# EAGLE board sidepcb (EAGLE 6.5.0)
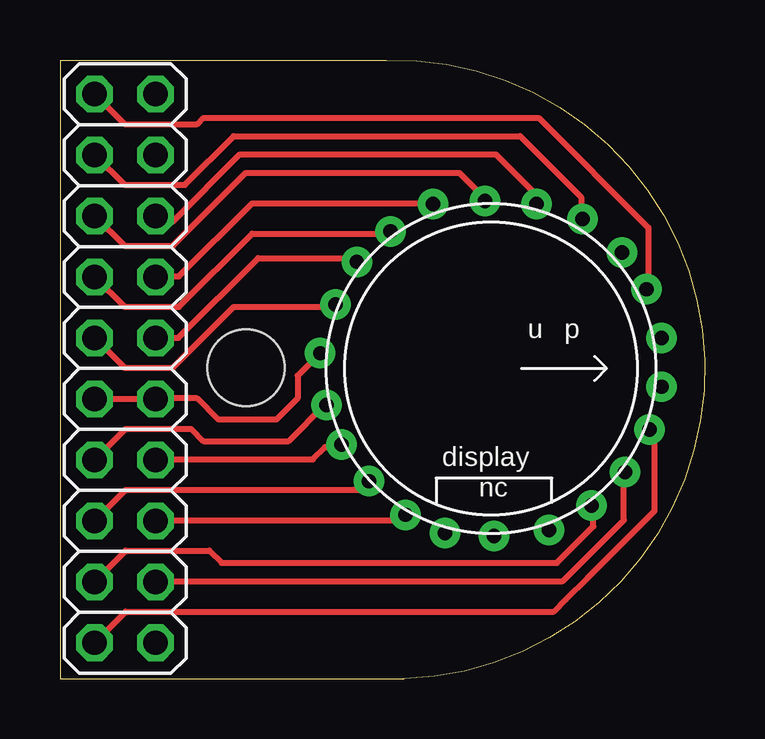
[diagram p0: board, top side]
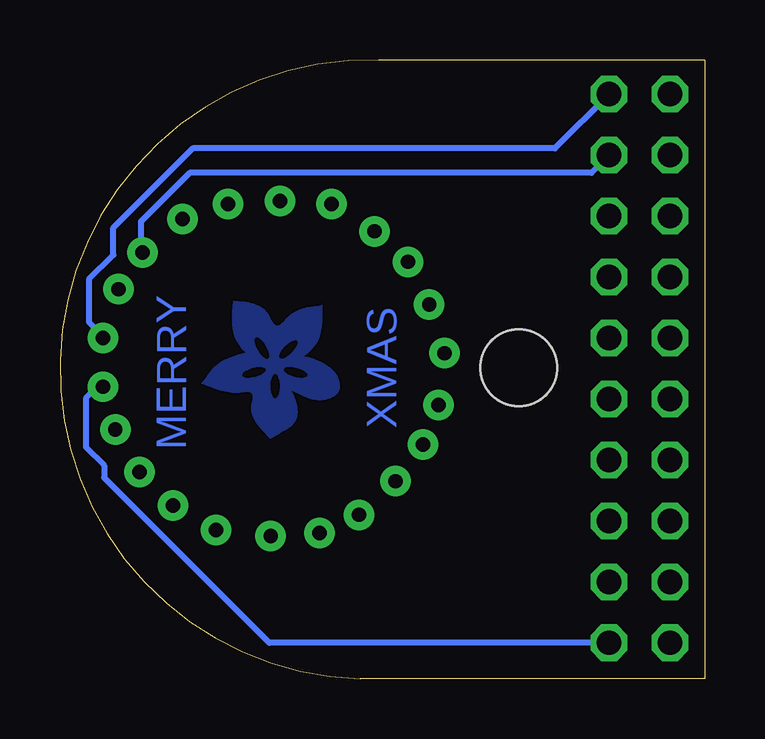
[diagram p1: board, bottom side, seen from below]

Size 26.86 x 25.78 mm. Coordinates in mm from the lower left corner, seen from the top.
Outline: 0,25.78 0,0 14.35,0 arc180 13.59,25.78 0,25.78
Copper layers (1*16): Top 0.0356mm / dielectric 1.5011mm / Bottom 0.0356mm
Design rules "LaenPCBOrder": minimum track width 6mil, minimum drill 13mil, track to track 6mil, track to pad 6mil, pad to pad 6mil, via to via 6mil, smd to smd 6mil, copper to edge 15mil, drill to drill 6mil, minimum pad ring 7mil, minimum via ring 7mil, stop-mask expansion 4mil, vias tented up to drill 0mil, thermal gap 10mil
Net classes: 0 default: clearance 0.205 mm
Holes 3.2 mm at 7.75,12.95

## Footprints (pad centres in the part's own frame; a part is rotated, then mirrored left to right if it is on the bottom)
IV18 = drill 0.6 pad 1.27: 1 -0.635,-7.112; 2 1.524,-6.858; 3 3.175,-6.223; 4 4.699,-5.08; 5 6.096,-3.556; 6 6.858,-1.905; 7 6.985,0.127; 8 6.731,2.413; 9 5.715,4.191; 10 4.318,5.588; 11 2.54,6.604; 12 0.762,7.112; 13 -1.27,7.112; 14 -3.302,6.477; 15 -4.826,5.461; 16 -6.223,3.81; 17 -6.858,1.905; 18 -6.985,-0.254; 19 -6.858,-2.413; 20 -5.715,-4.191; 21 -4.445,-5.588; 22 -2.667,-6.477
2X10 = drill 1.016 octagon: 1 -11.43,-1.27; 2 -11.43,1.27; 3 -8.89,-1.27; 4 -8.89,1.27; 5 -6.35,-1.27; 6 -6.35,1.27; 7 -3.81,-1.27; 8 -3.81,1.27; 9 -1.27,-1.27; 10 -1.27,1.27; 11 1.27,-1.27; 12 1.27,1.27; 13 3.81,-1.27; 14 3.81,1.27; 15 6.35,-1.27; 16 6.35,1.27; 17 8.89,-1.27; 18 8.89,1.27; 19 11.43,-1.27; 20 11.43,1.27

## Placement (x,y rotation side)
DIS1  IV18  [IV18]  17.95,12.93 270 top
JP2  male  [2X10]  2.71,12.93 270 top

## Library data of the parts
DIS1 = vfd
JP2 = pinhead

## Nets
AC1: DIS1.13 JP2.2
AC2: DIS1.1 JP2.11 JP2.12
VFD'1: DIS1.15 JP2.4
VFD'2: DIS1.22 JP2.9
VFD'3: DIS1.16 JP2.3
VFD'4: DIS1.21 JP2.10
VFD'5: DIS1.17 JP2.6
VFD'6: DIS1.20 JP2.7
VFD'7: DIS1.19 JP2.8
VFD'8: DIS1.18 JP2.5
VFD'9: DIS1.14 JP2.1
VFD'A: DIS1.12 JP2.20
VFD'B: DIS1.10 JP2.18
VFD'C: DIS1.4 JP2.15
VFD'D: DIS1.3 JP2.14
VFD'E: DIS1.5 JP2.16
VFD'F: DIS1.11 JP2.19
VFD'G: DIS1.9 JP2.17
VFD'H: DIS1.2 JP2.13

## Tracks (layer width: path | path; a pad name or v marks a point on that pad's centre or on a via)
AC1
  Bottom 0.254: JP2.2 6.25,22.1 21.34,22.1 24.64,18.8 24.64,17.65 25.65,16.64 25.65,14.86 25.07,14.27 DIS1.13 25.09,14.22
AC2
  Top 0.254: DIS1.1 9.91,12.63 9.91,11.68 9.02,10.79 6.6,10.79 5.72,11.68 4.01,11.68 JP2.12 JP2.11
N$6
  cutout Bottom: 17,14.08 16.97,14.05 16.96,14.01 16.97,13.96 17,13.88 17.05,13.78 17.16,13.64 17.24,13.56 17.34,13.48 17.45,13.4 17.54,13.36 17.62,13.34 17.67,13.35 17.7,13.37 17.71,13.39 17.72,13.42 17.72,13.47 17.71,13.51 17.67,13.58 17.62,13.69 17.52,13.8 17.45,13.87 17.34,13.96 17.27,14.02 17.19,14.06 17.11,14.09 17.06,14.1 17.02,14.1
N$7
  cutout Bottom: 18.17,13.37 18.16,13.4 18.15,13.46 18.16,13.53 18.18,13.63 18.24,13.77 18.29,13.86 18.36,13.98 18.43,14.06 18.49,14.13 18.56,14.18 18.61,14.2 18.65,14.22 18.69,14.21 18.72,14.18 18.74,14.14 18.75,14.11 18.75,14.07 18.74,14.02 18.73,13.98 18.69,13.86 18.66,13.79 18.61,13.68 18.56,13.6 18.51,13.53 18.42,13.43 18.37,13.39 18.31,13.35 18.26,13.33 18.23,13.32 18.2,13.34 18.18,13.35
N$8
  cutout Bottom: 18.29,12.87 18.29,12.9 18.3,12.92 18.33,12.94 18.37,12.96 18.43,12.98 18.49,12.98 18.53,12.98 18.61,12.98 18.68,12.97 18.77,12.95 18.86,12.93 18.96,12.9 19.04,12.86 19.11,12.83 19.18,12.78 19.22,12.74 19.25,12.69 19.26,12.65 19.25,12.61 19.22,12.58 19.17,12.56 19.12,12.55 19.08,12.54 18.95,12.54 18.85,12.56 18.76,12.57 18.69,12.59 18.62,12.62 18.54,12.65 18.46,12.69 18.4,12.73 18.37,12.75 18.33,12.78 18.31,12.81 18.3,12.84 18.29,12.86
N$11
  cutout Bottom: 18.08,12.19 18.07,12.06 18.06,11.94 18.02,11.83 17.99,11.76 17.96,11.71 17.91,11.68 17.88,11.69 17.85,11.7 17.81,11.74 17.78,11.8 17.75,11.86 17.74,11.91 17.73,11.97 17.72,12.04 17.71,12.1 17.71,12.3 17.72,12.38 17.73,12.44 17.74,12.48 17.76,12.53 17.78,12.58 17.8,12.61 17.81,12.64 17.84,12.66 17.86,12.68 17.88,12.69 17.91,12.69 17.94,12.68 17.97,12.64 17.99,12.61 18.02,12.57 18.03,12.52 18.05,12.45 18.07,12.36
N$13
  cutout Bottom: 16.79,12.54 16.72,12.55 16.66,12.56 16.62,12.57 16.59,12.59 16.57,12.61 16.56,12.63 16.56,12.66 16.57,12.69 16.58,12.72 16.61,12.76 16.66,12.8 16.75,12.85 16.85,12.89 16.91,12.92 16.99,12.94 17.05,12.96 17.15,12.97 17.22,12.98 17.27,12.98 17.32,12.98 17.38,12.98 17.43,12.97 17.48,12.95 17.51,12.93 17.52,12.92 17.53,12.89 17.53,12.86 17.51,12.82 17.48,12.78 17.44,12.75 17.4,12.72 17.35,12.69 17.3,12.66 17.26,12.64 17.2,12.62 17.11,12.59 17.01,12.57 16.94,12.55 16.87,12.54
N$14
  pour Bottom: 16.7,13.45 16.71,13.45 16.69,13.45 16.6,13.51 16.55,13.56 16.48,13.62 16.38,13.73 16.27,13.85 16.2,13.94 16.12,14.06 16.08,14.16 16.04,14.27 16.01,14.37 15.99,14.48 15.97,14.57 15.95,14.69 15.93,14.89 15.93,15.5 15.94,15.57 15.94,15.58 15.98,15.57 16.06,15.55 16.24,15.52 16.39,15.49 16.56,15.47 16.7,15.44 16.85,15.39 16.98,15.34 17.07,15.29 17.2,15.21 17.3,15.13 17.37,15.07 17.45,14.99 17.51,14.93 17.56,14.86 17.6,14.82 17.63,14.79 17.68,14.75 17.74,14.73 17.79,14.72 17.83,14.72 17.87,14.73 17.91,14.75 17.94,14.77 17.97,14.81 18.02,14.87 18.06,14.94 18.1,15.02 18.15,15.13 18.18,15.18 18.21,15.23 18.26,15.3 18.33,15.37 18.4,15.44 18.48,15.48 18.59,15.54 18.69,15.59 18.78,15.62 18.9,15.65 19.02,15.68 19.13,15.7 19.26,15.72 19.44,15.73 19.54,15.74 19.64,15.73 19.64,15.67 19.65,15.58 19.66,15.47 19.67,15.35 19.69,15.15 19.69,15.01 19.69,14.88 19.68,14.76 19.66,14.58 19.64,14.48 19.59,14.28 19.54,14.15 19.48,14.04 19.4,13.92 19.32,13.81 19.25,13.71 19.2,13.66 19.15,13.61 19.11,13.59 19.09,13.58 19.15,13.57 19.22,13.56 19.31,13.54 19.4,13.51 19.56,13.47 19.67,13.43 19.79,13.38 19.95,13.31 20.08,13.25 20.19,13.18 20.29,13.11 20.41,13.01 20.47,12.95 20.54,12.87 20.59,12.8 20.64,12.74 20.68,12.68 20.75,12.59 20.8,12.53 20.84,12.48 20.9,12.4 20.95,12.34 20.98,12.31 20.94,12.29 20.88,12.27 20.78,12.23 20.68,12.19 20.59,12.16 20.41,12.09 20.32,12.06 20.22,12.03 20.13,12 20.01,11.97 19.88,11.95 19.79,11.93 19.71,11.92 19.65,11.92 19.51,11.91 19.38,11.92 19.29,11.93 19.22,11.94 19.16,11.95 19.08,11.96 19,11.95 18.95,11.94 18.92,11.93 18.89,11.91 18.86,11.88 18.84,11.84 18.83,11.79 18.82,11.72 18.83,11.64 18.84,11.56 18.87,11.47 18.88,11.4 18.89,11.35 18.9,11.26 18.89,11.16 18.87,11.08 18.84,10.97 18.79,10.85 18.72,10.74 18.67,10.66 18.63,10.6 18.54,10.47 18.42,10.33 18.34,10.25 18.22,10.12 18.12,10.02 18.07,9.99 18.01,10.03 17.91,10.1 17.83,10.15 17.72,10.22 17.61,10.28 17.53,10.34 17.41,10.4 17.29,10.48 17.23,10.53 17.19,10.57 17.13,10.62 17.08,10.69 17.03,10.77 17,10.86 16.98,10.93 16.97,11.02 16.96,11.12 16.97,11.23 16.98,11.31 17,11.44 17.03,11.53 17.07,11.65 17.1,11.73 17.12,11.79 17.15,11.85 17.18,11.9 17.21,11.96 17.23,12 17.25,12.03 17.24,12.04 17.2,12 17.11,11.96 17.02,11.92 16.92,11.87 16.75,11.79 16.65,11.74 16.5,11.68 16.37,11.64 16.26,11.62 16.12,11.6 16.04,11.6 15.95,11.6 15.84,11.62 15.78,11.63 15.69,11.66 15.61,11.69 15.56,11.71 15.49,11.75 15.44,11.78 15.39,11.82 15.34,11.86 15.3,11.9 15.28,11.94 15.25,11.98 15.22,12.04 15.2,12.1 15.19,12.16 15.19,12.22 15.2,12.28 15.22,12.38 15.24,12.45 15.27,12.51 15.3,12.58 15.36,12.68 15.44,12.8 15.51,12.88 15.58,12.94 15.66,13 15.76,13.07 15.87,13.14 15.99,13.2 16.15,13.27 16.29,13.32 16.49,13.39 16.62,13.43
VFD'1
  Bottom 0.254: JP2.4 4.72,21.08 21.46,21.08 23.49,19.05 23.49,17.84 DIS1.15
VFD'2
  Top 0.254: JP2.9 2.69,12.95 4.7,12.95 7.24,15.49 11.56,15.49 11.56,15.52 DIS1.22
VFD'3
  Top 0.254: JP2.3 2.69,20.57 5.21,20.57 7.24,22.61 19.18,22.61 21.72,20.07 21.72,19.3 21.76,19.26 DIS1.16
VFD'4
  Top 0.254: JP2.10 4.93,14.2 8.26,17.53 12.52,17.53 | 12.52,17.53 12.57,17.53 | 12.52,17.53 DIS1.21
VFD'5
  Top 0.254: DIS1.17 19.88,19.81 19.94,19.81 19.94,20.07 18.16,21.84 7.49,21.84 4.7,19.05 4.45,19.05 4.19,19.3 4.17,19.28 JP2.6
VFD'6
  Top 0.254: JP2.7 2.69,15.49 4.95,15.49 8,18.54 13.84,18.54 13.84,18.56 DIS1.20
VFD'7
  Top 0.254: DIS1.19 15.52,19.81 8,19.81 4.95,16.76 4.19,16.76 4.17,16.74 JP2.8
VFD'8
  Top 0.254: JP2.5 2.69,18.03 4.7,18.03 7.75,21.08 16.64,21.08 17.65,20.07 17.65,19.87 | 17.65,19.87 17.65,19.81 | 17.65,19.87 DIS1.18
VFD'9
  Top 0.254: JP2.1 2.69,23.11 5.72,23.11 5.97,23.37 19.94,23.37 24.51,18.8 24.51,16.26 24.46,16.26 DIS1.14
VFD'A
  Bottom 0.254: JP2.20 18.14,1.5 25.02,8.38 25.02,8.89 25.78,9.65 25.78,11.68 25.27,12.19 25.25,12.17 DIS1.12
VFD'B
  Top 0.254: JP2.18 4.01,4.06 20.95,4.06 23.49,6.6 23.49,8.64 23.52,8.64 DIS1.10
VFD'C
  Top 0.254: JP2.15 2.74,7.87 13.08,7.87 13.08,8.02 DIS1.4
VFD'D
  Top 0.254: JP2.14 4.01,9.14 10.54,9.14 11.05,9.65 11.63,9.65 DIS1.3
VFD'E
  Top 0.254: DIS1.5 14.17,6.6 4.01,6.6 JP2.16
VFD'F
  Top 0.254: JP2.19 2.74,2.79 20.57,2.79 21.08,3.3 21.97,4.19 24.77,6.99 24.77,10.18 DIS1.11
VFD'G
  Top 0.254: JP2.17 2.74,5.33 6.22,5.33 6.73,4.83 20.7,4.83 22.23,6.35 22.23,7.13 DIS1.9
VFD'H
  Top 0.254: JP2.13 2.74,10.41 5.46,10.41 5.97,9.91 9.53,9.91 11.05,11.43 11.07,11.43 DIS1.2

## Text on the board
Bottom: MERRY | XMAS